# EAGLE board Wireless Power Transmission Project (EAGLE 6.5.0)
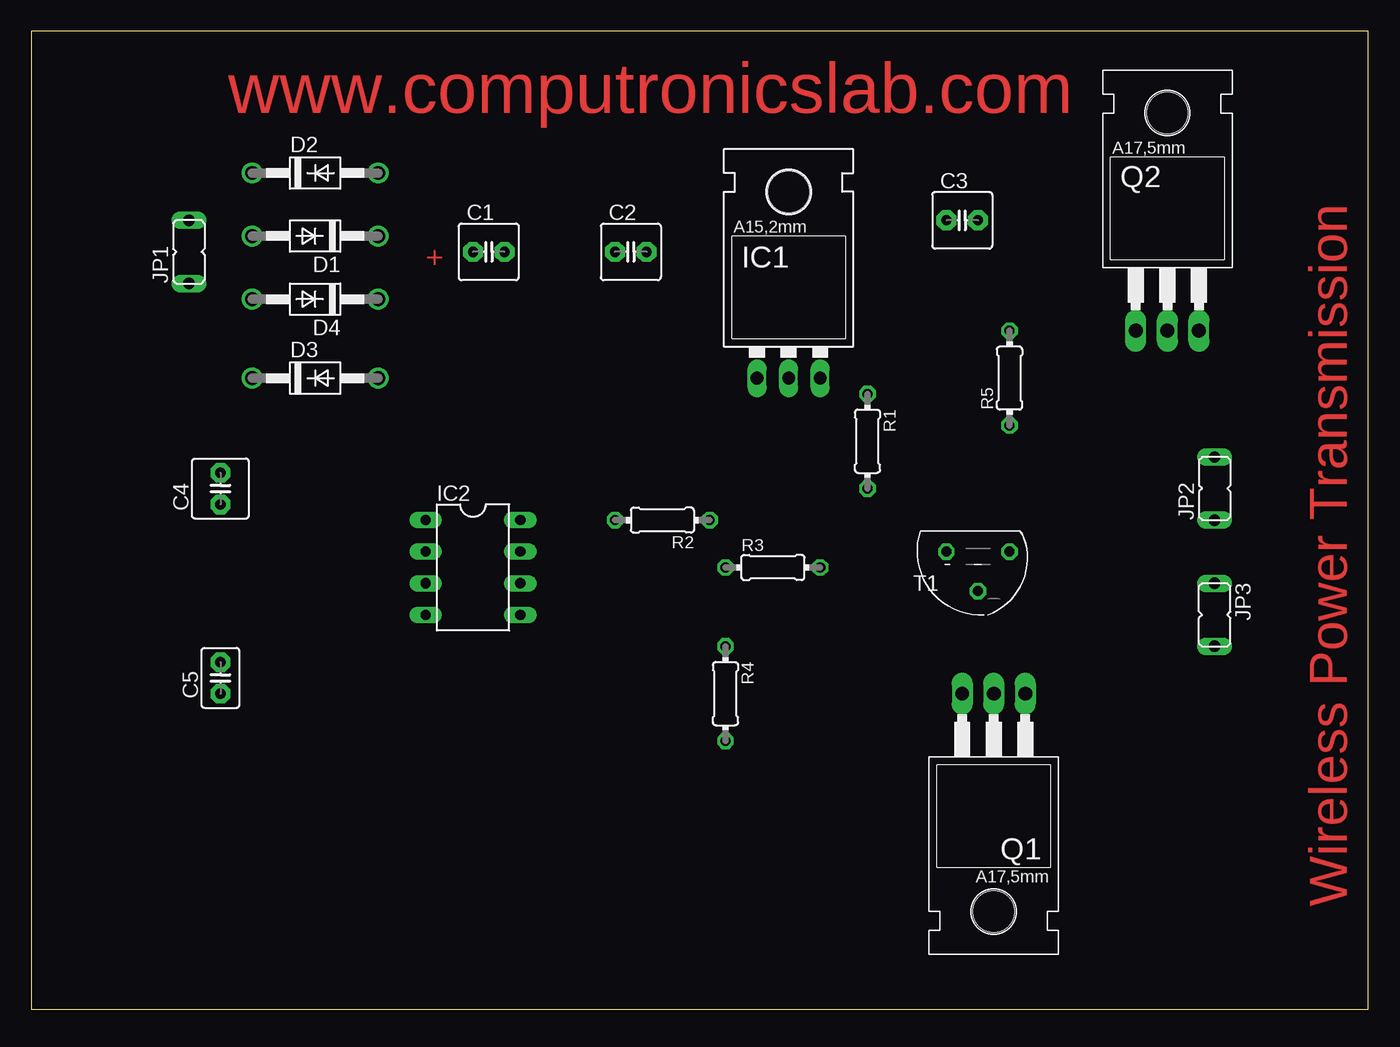
[diagram p0: board, top side]
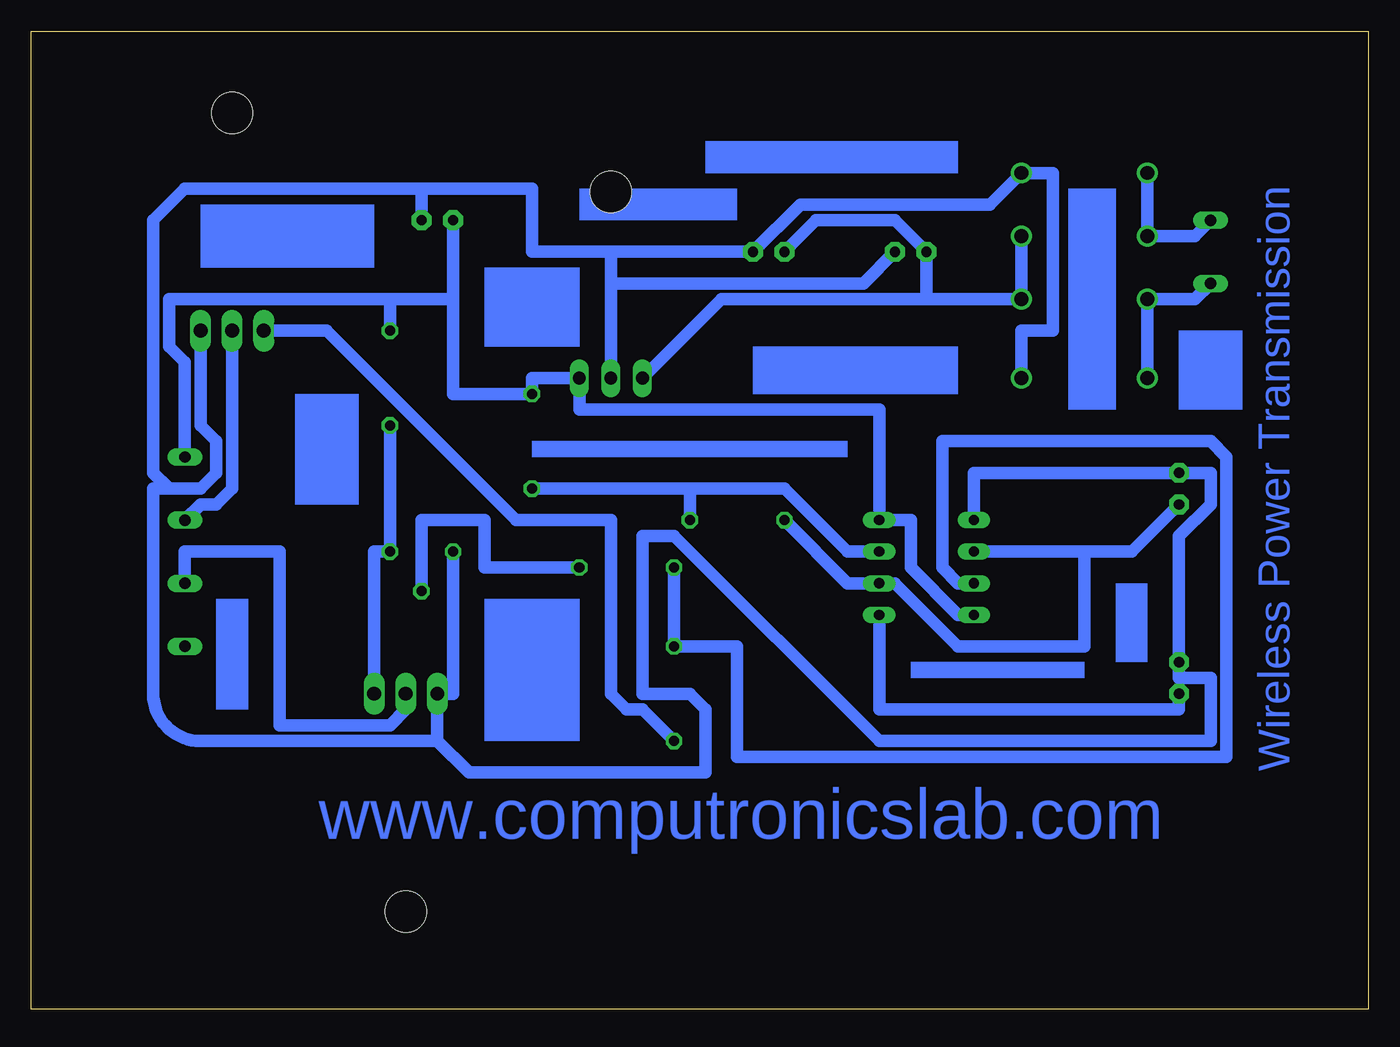
[diagram p1: board, bottom side, seen from below]

Size 107.62 x 78.73 mm. Coordinates in mm from the lower left corner, seen from the top.
Outline: 0,0 107.62,0 107.62,78.73 0,78.73 0,0
Copper layers (1*16): Top 0.035mm / dielectric 1.5mm / Bottom 0.035mm
Design rules "default *": minimum track width 40mil, minimum drill 30mil, track to track 8mil, track to pad 8mil, pad to pad 8mil, via to via 8mil, smd to smd 8mil, copper to edge 40mil, drill to drill 8mil, minimum pad ring 10mil, minimum via ring 8mil, stop-mask expansion 4mil, vias tented up to drill 0mil, thermal gap 10mil

## Footprints (pad centres in the part's own frame; a part is rotated, then mirrored left to right if it is on the bottom)
C2.5-5 = drill 0.813 pad 1.6 octagon: 1 -1.27,0; 2 1.27,0
C2.5-3 = drill 0.813 pad 1.6 octagon: 1 -1.27,0; 2 1.27,0
DO41-10 = drill 1.118: A 5.08,0; C -5.08,0
78XXL = drill 1.016 long: GND 0,-3.81; IN -2.54,-3.81; OUT 2.54,-3.81 | hole 3.302: 0,11.176
DIL-08 = drill 0.813 long: 1 -3.81,-3.81; 2 -1.27,-3.81; 3 1.27,-3.81; 4 3.81,-3.81; 5 3.81,3.81; 6 1.27,3.81; 7 -1.27,3.81; 8 -3.81,3.81
JP1 = drill 0.914 long: 1 0,-2.54; 2 0,2.54
TO220 = drill 1.118 long: 1 -2.54,-6.35; 2 0,-6.35; 3 2.54,-6.35 | hole 3.302: 0,11.176
0204/7 = drill 0.813 octagon: 1 -3.81,0; 2 3.81,0
TO92 = drill 0.813 octagon: 1 2.54,-1.27; 2 0,1.905; 3 -2.54,-1.27

## Placement (x,y rotation side)
C1  1000uf  [C2.5-5]  36.83,60.96 0 top
C2  0.1uf  [C2.5-5]  48.26,60.96 0 top
C3  0.1uf  [C2.5-5]  74.93,63.5 0 top
C4  0.1uf  [C2.5-5]  15.24,41.91 90 top
C5  0.1uf  [C2.5-3]  15.24,26.67 90 top
D1  1N4007  [DO41-10]  22.86,62.23 180 top
D2  1N4007  [DO41-10]  22.86,67.31 0 top
D3  1N4007  [DO41-10]  22.86,50.8 0 top
D4  1N4007  [DO41-10]  22.86,57.15 180 top
IC1  7812  [78XXL]  60.96,54.61 0 top
IC2  NE555  [DIL-08]  35.56,35.56 270 top
JP1  transformer  [JP1]  12.7,60.96 0 top
JP2  2 pin  [JP1]  95.25,41.91 0 top
JP3  2 pin  [JP1]  95.25,31.75 180 top
Q1  IRF540  [TO220]  77.47,19.05 180 top
Q2  IRF540  [TO220]  91.44,60.96 0 top
R1  1 k  [0204/7]  67.31,45.72 270 top
R2  4.7E  [0204/7]  50.8,39.37 180 top
R3  5.6k  [0204/7]  59.69,35.56 0 top
R4  1k  [0204/7]  55.88,25.4 270 top
R5  1k  [0204/7]  78.74,50.8 90 top
T1  BC547  [TO92]  76.2,35.56 180 top

## Library data of the parts
C1-C5 = capacitor-wima
D1-D4 = diode
IC1 = v-reg
IC2 = st-microelectronics; MF: Arrow Electronics; MPN: NE555N; OC_FARNELL: 1467742; OC_NEWARK: 89K1486
JP1-JP3 = jumper
Q1 Q2 = transistor-fet
R1-R5 = rcl
T1 = transistor

## Nets
N$1: D1.A D2.C JP1.2
N$2: C1.2 C2.2 C3.2 C4.2 C5.2 D2.A D3.A IC1.GND IC2.1 Q1.3 Q2.3 T1.1
N$3: D3.C D4.A JP1.1
N$4: C1.1 C2.1 D1.C D4.C IC1.IN
N$5: C5.1 IC2.5
N$6: IC2.3 R3.1 R4.1
N$7: C3.1 IC1.OUT IC2.4 IC2.8 JP2.2 R1.1 R5.2
N$9: IC2.7 R1.2 R2.1
N$10: R3.2 T1.2
N$11: C4.1 IC2.2 IC2.6 R2.2
N$12: Q1.1 R5.1 T1.3
N$13: Q2.1 R4.2
N$14: JP2.1 Q2.2
N$15: JP3.1 Q1.2

## Tracks (layer width: path | path; a pad name or v marks a point on that pad's centre or on a via)
N$1
  Bottom 1.016: JP1.2 13.97,62.23 D1.A D2.C
N$2
  Bottom 1.016: IC2.1 31.75,43.18 C4.2 12.7,43.18 12.7,40.64 15.24,38.1 C5.2 15.24,26.67 12.7,26.67 12.7,21.59 39.37,21.59 55.88,38.1 58.42,38.1 58.42,25.4 54.61,25.4 53.34,24.13 53.34,19.05 72.39,19.05 74.93,21.59 | D3.A 27.94,54.61 25.4,54.61 25.4,67.31 D2.A 30.48,64.77 45.72,64.77 C2.2 60.96,60.96 | T1.1 73.66,25.4 Q1.3 74.93,21.59 | 60.96,60.96 60.96,58.42 | 60.96,58.42 IC1.GND | C1.2 40.64,58.42 60.96,58.42 | 76.2,66.04 67.31,66.04 67.31,60.96 60.96,60.96 | Q2.3 93.98,46.99 92.71,45.72 92.71,43.18 93.98,41.91 96.52,41.91 | 96.52,41.91 97.79,43.18 97.79,63.5 95.25,66.04 76.2,66.04 | C3.2 76.2,66.04 | 74.93,21.59 93.98,21.59 arc90 97.79,25.4 97.79,41.91 96.52,41.91
N$3
  Bottom 1.016: JP1.1 13.97,57.15 D4.A D3.C
N$4
  Bottom 1.016: IC1.IN 52.07,57.15 35.56,57.15 | 35.56,57.15 D4.C D1.C | 35.56,57.15 C1.1 38.1,63.5 44.45,63.5 C2.1
N$5
  Bottom 1.016: IC2.5 39.37,24.13 15.24,24.13 C5.1
N$6
  Bottom 1.016: R3.1 R4.1 50.8,29.21 50.8,20.32 11.43,20.32 11.43,44.45 12.7,45.72 34.29,45.72 34.29,35.56 33.02,34.29 IC2.3
N$7
  Bottom 1.016: IC2.4 33.02,31.75 36.83,35.56 36.83,39.37 IC2.8 39.37,48.26 63.5,48.26 IC1.OUT 67.31,50.8 R1.1 73.66,49.53 73.66,57.15 | JP2.2 95.25,52.07 96.52,53.34 96.52,57.15 78.74,57.15 | R5.2 78.74,57.15 | 78.74,57.15 73.66,57.15 | 73.66,57.15 C3.1
N$9
  Bottom 1.016: IC2.7 41.91,36.83 46.99,41.91 54.61,41.91 | R1.2 54.61,41.91 | 54.61,41.91 R2.1
N$10
  Bottom 1.016: T1.2 76.2,39.37 71.12,39.37 71.12,35.56 67.31,35.56 R3.2
N$11
  Bottom 1.016: R2.2 41.91,34.29 IC2.6 38.1,34.29 33.02,29.21 30.48,29.21 22.86,29.21 22.86,36.83 | 22.86,36.83 19.05,36.83 C4.1 | 22.86,36.83 IC2.2
N$12
  Bottom 1.016: R5.1 T1.3 80.01,36.83 Q1.1
N$13
  Bottom 1.016: R4.2 58.42,24.13 59.69,24.13 60.96,25.4 60.96,39.37 68.58,39.37 83.82,54.61 Q2.1
N$14
  Bottom 1.016: JP2.1 93.98,40.64 92.71,40.64 91.44,41.91 Q2.2
N$15
  Bottom 1.016: JP3.1 95.25,36.83 87.63,36.83 87.63,22.86 78.74,22.86 77.47,24.13 Q1.2
(copper drawn outside any net)
  shapes: Bottom area x13

## Text on the board
Top: www.computronicslab.com | Wireless Power Transmission | +
Bottom: Wireless Power Transmission | www.computronicslab.com